# Altium PCB Interconnect.PcbDoc
Units mm, origin at the board's own origin, x right, y up, seen from the top; angles counter-clockwise.
Board outline 70 x 20 mm, 2 copper layers (Top Layer, GND); 2 components, 3 nets, 18 pads, 0 vias.
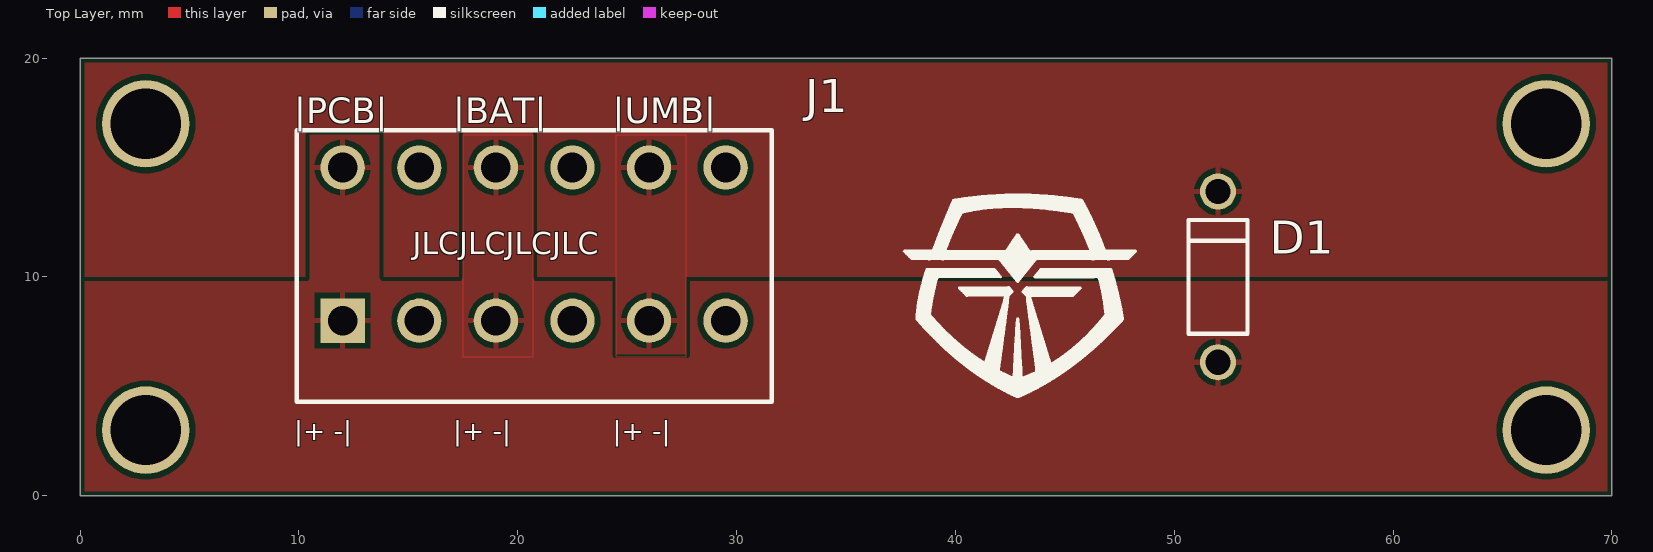
[diagram p0: Top Layer view]
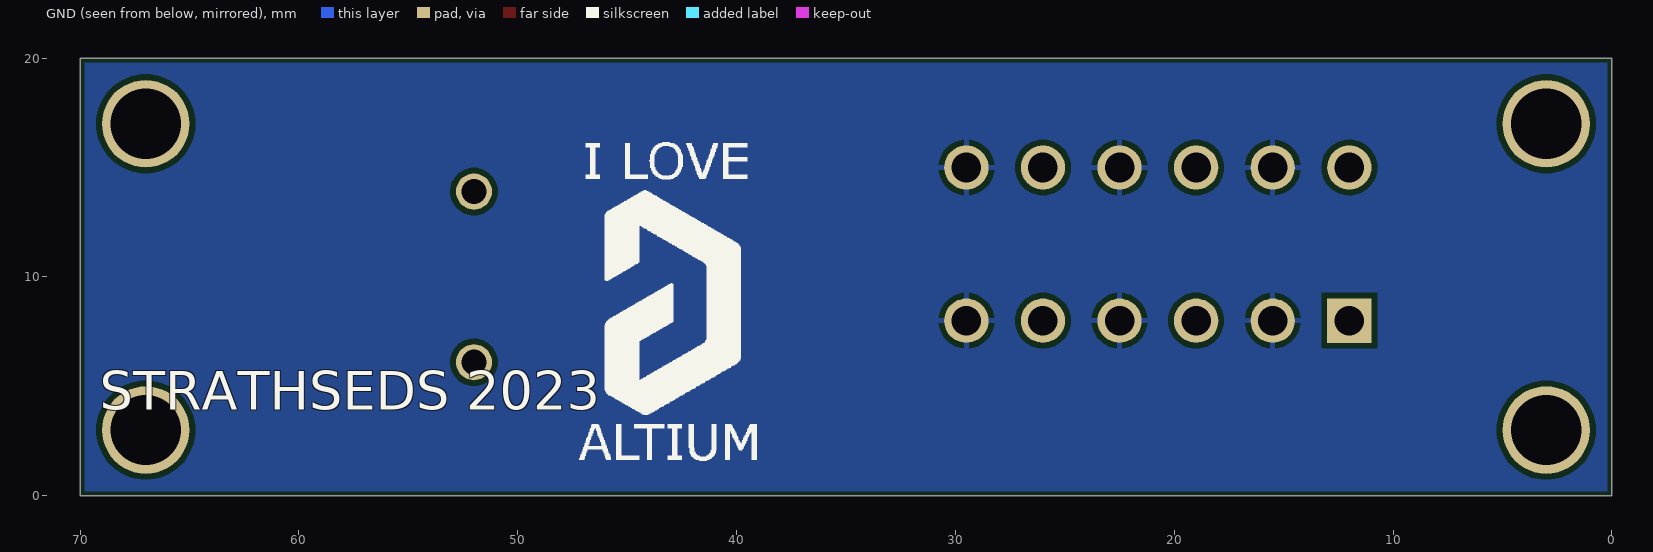
[diagram p1: GND view, seen from below]

## Layer stack, top to bottom
Top Solder: solder mask 0.0102, Solder Resist, Dk 3.5
Top Layer: signal copper 0.0356
Dielectric 1: dielectric 0.32, FR-4, Dk 4.8
GND: signal copper 0.0356
Bottom Solder: solder mask 0.0102, Solder Resist, Dk 3.5

## Board outline
0,0 0,20 70,20 70,0

## Design rules (kind name [scope] priority, off if disabled: settings)
BoardOutlineClearance [All] p1: gap=0.2 ignorepadtopadclearanceinfootprint=FALSE
Clearance [All] p1: gap=0.254 ignorepadtopadclearanceinfootprint=TRUE except(0: Arc-Hole Track-Hole SMDPad-Hole THPad-Hole Via-Hole Fill-Hole Poly-Hole Region-Hole Text-Hole; 0.09: Arc-Arc Arc-Track Track-Track; 0.127: SMDPad-SMDPad; 0.2: Arc-SMDPad Track-SMDPad SMDPad-Fill SMDPad-Poly SMDPad-Region Fill-Fill Fill-Poly Fill-Region Poly-Poly Poly-Region Region-Region; 0.33: Arc-THPad Track-THPad; 0.5: THPad-THPad)
DiffPairsRouting [All] p1: maxlimit=0.254 minlimit=0.09 mostfreqgap=0.254 toplayer_minwidth=0.09 toplayer_maxwidth=0.381 toplayer_prefwidth=0.254 bottomlayer_minwidth=0.09 bottomlayer_maxwidth=0.381 bottomlayer_prefwidth=0.254 maxuncoupledlength=12.7
HoleSize [All] p1: absolutevalues=TRUE maxlimit=6.3 minlimit=0.2 maxpercent=80.000 minpercent=20.000
HoleToHoleClearance [All] p1: gap=0.5 allowstackedmicrovias=TRUE
MinimumSolderMaskSliver [All] p1: minsoldermaskwidth=0.1
PlaneClearance [All] p1: clearance=0.254
PlaneConnect [All] p1: pad.planeconnectstyle=Relief pad.reliefexpansion=0.254 pad.reliefentries=4 pad.reliefconductorwidth=0.254 pad.reliefairgap=0.254 via.planeconnectstyle=Direct via.reliefexpansion=0.508 via.reliefentries=4 via.reliefconductorwidth=0.254 via.reliefairgap=0.254
PolygonConnect [All] p1: thpad.connectstyle=Relief thpad.reliefconductorwidth=0.254 thpad.reliefentries=4 thpad.polygonreliefangle="90 Angle" thpad.airgapwidth=0.254 smdpad.connectstyle=Direct smdpad.reliefconductorwidth=0.254 smdpad.reliefentries=4 smdpad.polygonreliefangle="90 Angle" smdpad.airgapwidth=0.254 via.connectstyle=Direct via.reliefconductorwidth=0.254 via.reliefentries=4 via.polygonreliefangle="90 Angle" via.airgapwidth=0.254
RoutingVias [All] p1: holewidth=0.2 width=0.35 viastyle="Through Hole" minholewidth=0.15 minwidth=0.25 maxholewidth=0.711 maxwidth=1.27 useviatemplates=TRUE viatemplateguid#1={842D295A-8E56-4614-9B11-91D02DC00ACA} viatemplateguid#2={7C6A3F83-D217-419B-9190-88431C2A1CC1} viatemplatename#1=v30h20 viatemplatename#2=v35h20
SilkToSilkClearance [All] p1: silktosilkclearance=0.09
SilkToSolderMaskClearance [IsPad] p1: minsilkscreentomaskgap=0.15 clearancetoexposedcopper=TRUE
SolderMaskExpansion SolderMaskExpansion_via [IsVia] p1: expansion=0.102 istentingtop=TRUE
SolderMaskExpansion [All] p2: expansion=0.05 istentingtop=FALSE
Width [All] p1: maxlimit=0.76 minlimit=0.09 preferedwidth=0.254
22 further rules are at their usual default settings.

## Components (designator, comment, footprint, x,y, rotation, side; value= is the part's Value field where it differs from the comment)
D1 "1N4007" FAIR-DO-41-2 52,10 r90 top
J1 "1824460000" SHDR12W80P700X350_2X6_2170X1400X850P 12,8 r0 top

## Footprints (in the part's own frame and the unit in brackets; to place one, negate y for a bottom-side part, rotate by r counter-clockwise, add the part's x,y. Pads: shape width x height; smd on the part's side, far side on the other; paste and mask are expansions set on the pad)
FAIR-DO-41-2 [mm] "THD, 2-Leads, Body 5.2x2.72mm, Pin Spacing 7.8mm"
  round 1.65 hole 1.15: 1(-3.9,0) 2(3.9,0)
  silkscreen extent -2.6,-1.35 2.6,1.35, body extent -4.29,-1.17 4.29,1.17, height 2.35
SHDR12W80P700X350_2X6_2170X1400X850P [mm]
  rect 2.025x2.025 hole 1.35: 1(0,0)
  round 2.025 hole 1.35: 2(0,7) 3(3.5,0) 4(3.5,7) 5(7,0) 6(7,7) 7(10.5,0) 8(10.5,7) 9(14,0) 10(14,7) 11(17.5,0) 12(17.5,7)
  silkscreen extent -2.1,-3.7 19.6,8.7, body extent -2.1,-5.68 19.6,8.62, height 8.39

## Part data
D1: library part CMP-004-00007-2, "General Purpose Rectifier, 1.1 V, 1.0 A, -55 to 175 degC, 2-Pin DO-41, RoHS, Tape and Reel", Case/Package=DO-41-2, Forward Current=1A, Forward Voltage=1.1V, Manufacturer=Fairchild, Max Operating Temperature=175°C, Max Surge Current=30A, Min Operating Temperature=-55°C, Package Description="2-Pin Axial Lead, Dia 2.375 mm, Body Length 4.63 mm", Package Quantity=5000, Package Version="Rev. 2, 09/2008", Peak Reverse Current=5uA, Datasheet URL=https://www.fairchildsemi.com/datasheets/1N/1N4007.pdf, Datasheet Version="Rev. 1.1.0, 11/2014", Elements=1, Manufacturer URL=https://www.fairchildsemi.com/, Mounting Technology=TH, Package Reference=DO-41-2, Package URL=http://www.fairchildsemi.com/dwg/DO/DO41A.pdf, Packaging=TapeandReel, Pins=2, RoHS Compliant=True
J1: library part CMP-062-000000-2, "Printed circuit board terminals, 3.50 mm, Number of poles: 6, 90, Solder pin length: 3.5 mm, black, PUSH IN with actuator, Clamping range, max. [rated connection]: 1.5 mm, Tube", Manufacturer_Name=Weidmuller, Mouser Part Number=470-1824460000, Datasheet Link=http://catalog.weidmueller.com/createDatasheetForMobile.do?ordernumber=1824460000&scope1=1&scope2=1&localeId=en, Design Item ID=1824460000, Geometry.Height=8.5mm, Manufacturer_Part_Number=1824460000, Mouser Price/Stock=https://www.mouser.co.uk/ProductDetail/Weidmuller/1824460000?qs=WJDKaGZ8K%252B6qGfZkM4Ritg%3D%3D, Source=1824460000.SchLib

## Free pads (board coordinates)
  round 4 hole 3.2: 1(3,3) 1(3,17) 1(67,3) 1(67,17)

## Nets (pads, with @x,y where several pads share a name; then routed paths per layer and width w, separated by ;. In a path a pad name is that pad's centre, name@x,y a point inside that pad or via, vN(x,y) a via of type N, cw(c..) or ccw(c..) an arc to the next point about the centre after c; other vN are vias at no path point)
GND: J1.3 J1.4 J1.7 J1.8 J1.11 J1.12
In+: D1.2 J1.9 J1.10
Out+: D1.1 J1.1 J1.2 J1.5 J1.6

## Polygon pours and split planes (outlines as drawn)
GND on GND "NONET_L-01_P-001" (solid, pour order 1): 0,21.59 72.771,21.59 72.898,21.717 73.279,21.336 73.279,0 0,0
no net on Top Layer "NONET_L-01_P-001" (solid, pour order 8): 24.5,16.5 27.675,16.5 27.675,6.34 24.5,6.34
no net on Top Layer "NONET_L-01_P-001" (solid, pour order 7): 17.5,16.5 20.675,16.5 20.675,6.34 17.5,6.34
Out+ on Top Layer "NONET_L-01_P-001" (solid, pour order 4): 10.5,16.5 13.675,16.5 13.675,6.34 10.5,6.34
Out+ on Top Layer "NONET_L-01_P-001" (solid, pour order 3): 17.511,16.637 20.686,16.637 20.686,6.477 17.511,6.477
In+ on Top Layer "NONET_L-01_P-001" (solid, pour order 2): 24.511,16.637 27.686,16.637 27.686,6.477 24.511,6.477
Out+ on Top Layer "NONET_L-01_P-001" (solid, pour order 6): 0,10 0,0 70,0 70,10
In+ on Top Layer "NONET_L-01_P-001" (solid, pour order 5): 0,20 0,10 70,10 70,20

## Silkscreen, mask and mechanical layers (free items; w line width, h text height)
Top Overlay:
  drawing of 2 lines, arcs and shapes, not listed
  text "|PCB|" at 9.79,16.637 h2
  text "|BAT|" at 17.06,16.637 h2
  text "|UMB|" at 24.352,16.637 h2
  text "JLCJLCJLCJLC" at 15.199,11.045 h1
  text "|+ -|" at 9.79,2.25 h1.52
  text "|+ -|" at 17.06,2.25 h1.52
  text "|+ -|" at 24.352,2.25 h1.52
Bottom Overlay:
  drawing of 12 lines, arcs and shapes, not listed
  text "STRATHSEDS 2023" at 69.092,3.365 h3
Mechanical 1:
  the board outline again, w0.254